# Altium PCB PCB_V3.PcbDoc (part 2 of 2)
Units mm, origin at the board's own origin, x right, y up, seen from the top; angles counter-clockwise.
Board outline 100 x 50 mm, 4 copper layers (Top Layer, Vdd, GND, Bottom Layer), stack 0.603 mm thick; 120 components, 77 nets, 428 pads, 297 vias.
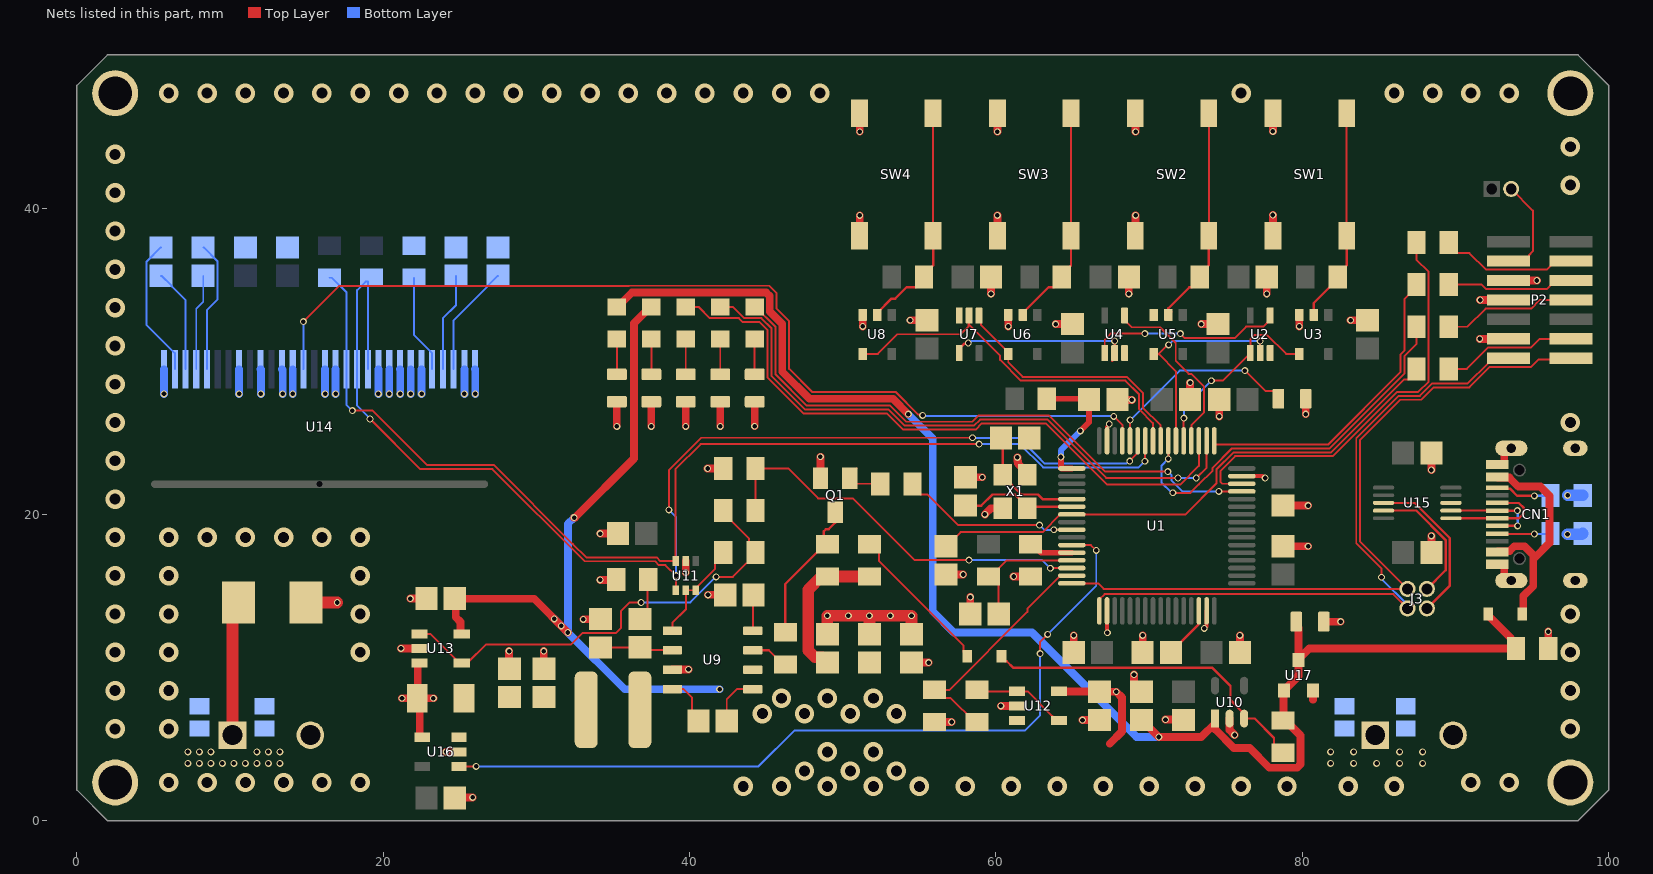
[diagram p4: the nets of this part, all layers, seen from the top]

## Via types
v1: diameter 0.45, hole 0.3, Top Layer to Bottom Layer, 202 vias
v2: diameter 1.27, hole 0.711, Top Layer to Bottom Layer, 95 vias

## Nets (pads, with @x,y where several pads share a name; then routed paths per layer and width w, separated by ;. In a path a pad name is that pad's centre, name@x,y a point inside that pad or via, vN(x,y) a via of type N, cw(c..) or ccw(c..) an arc to the next point about the centre after c; other vN are vias at no path point) (continued)
+12: C29.1 C30.1 C31.1 C41.1 C42.1 C44.2 C45.2 J2.1 LED3.2 R23.2 R37.1 U9.2 U12.3 U12.5 U13.5 U17.2 | length 65.8
  Top Layer w0.508: U13.5@25.225,12.2 25.116,12.2 25.045,12.271 25.045,12.978 24.738,13.286 24.738,14.437 C42.1@24.675,14.5 29.848,14.5 v1(32.055,12.294) ; v1(32.461,19.787) 32.512,19.787 36.373,23.647 36.373,32.473 37.45,33.55 LED3.2@37.5,33.55 ; C31.1@54.5,10.325 55.403,10.325 v1(55.602,10.325) ; U12.5@64.225,8.45 64.237,8.438 66.737,8.438 C41.1@66.75,8.425 67.653,8.425 v1(67.852,8.425) 68.225,8.052 68.225,5.825 67.425,5.025 ; 80.7,7.897 U17.2@80.7,8.5
  Top Layer w0.762: C29.1@49,10.325 48.656,10.669 48.188,10.669 47.742,11.115 47.742,15.092 48.6,15.95 R37.1@51.25,15.95
  Bottom Layer w0.508: v1(31.162,13.183) 31.166,13.183 v1(31.623,12.725) v1(32.055,12.294) ; v1(32.461,19.787) 32.055,19.38 v1(32.055,12.294) ; v1(41.961,8.585) 35.763,8.585 v1(32.055,12.294)
  other v1: 81.85,3.75 83.35,3.75 84.85,3.75 86.35,3.75 87.85,3.75 81.85,4.5 83.35,4.5 86.35,4.5 87.85,4.5
  other v2: 43.5,2.25 46,2.25 49,2.25 52,2.25 55,2.25 58,2.25 61,2.25 64,2.25 67,2.25 70,2.25 73,2.25 76,2.25 79,2.25 83,2.25 86,2.25 47.5,3.25 50.5,3.25 53.5,3.25 49,4.5 52,4.5 44.75,7 47.5,7 50.5,7 53.5,7 46,8 49,8 52,8
AGND: R7.1 U1.12 | length 2.9
  Top Layer w0.381: R7.1@62.25,18.05 62.4,18.05 62.95,17.5 U1.12@64.95,17.5
CH_RX: J3.2 U15.9 | length 8.6
  Top Layer w0.152: U15.9@85.3,20.25 87.437,20.25 89.353,18.334 89.353,16.353 J3.2@88.135,15.135
CH_TX: J3.4 U15.8 | length 10.5
  Top Layer w0.152: U15.8@85.3,20.75 87.332,20.75 89.633,18.45 89.633,15.363 J3.4@88.135,13.865
D_N: CN1.A7 CN1.B7 U15.2 | length 6.7
  Top Layer w0.152: U15.2@89.7,20.25 CN1.A7@92.725,20.25 92.728,20.247 94.031,20.247 v1(94.034,20.244) ; CN1.B7@92.725,19.25 92.727,19.252 94.055,19.252 v1(94.056,19.253)
  Bottom Layer w0.152: v1(94.034,20.244) 94.056,20.222 v1(94.056,19.253)
D_P: CN1.A6 CN1.B6 U15.1 | length 7.1
  Top Layer w0.152: U15.1@89.7,19.75 CN1.A6@92.725,19.75 94.146,19.75 94.463,20.066 94.463,20.421 94.134,20.75 CN1.B6@92.725,20.75
GND: C1.2 C2.1 C3.1 C4.2 C5.1 C6.1 C7.1 C8.1 C9.1 C10.1 C11.1 C12.1 C13.2 C14.2 C15.2 C16.2 C17.2 C18.2 C19.2 C20.2 C21.1 C24.2 C25.2 C26.1 C27.1 C28.2 C29.2 C30.2 C31.2 C33.1 C34.1 C35.2 C37.2 C38.1 C39.1 C40.2 C41.2 C42.2 C43.1 C44.1 C45.1 C46.1 C47.1 CN1.A1/B12 CN1.B1/A12 CN1.S1 CN1.S2 CN1.S3 CN1.S4 D2.2 J1.2 J2.2 P2.5 P2.7 P2.11 pad.2 Q1.2 R7.2 R14.2 R15.2 R16.2 R18.2 R20.1 R25.1 R27.1 R29.1 R30.1 R31.1 R32.1 R33.1 R34.1 SW1.1 SW1.3 SW2.1 SW2.3 SW3.1 SW3.3 SW4.1 SW4.3 U1.18 U1.31 U1.47 U1.63 U2.3 U3.3 U4.3 U5.3 U6.3 U7.3 U8.3 U9.7 U10.2 U11.2 U12.2 U13.2 U14.1 U14.8 U14.10 U14.12 U14.13 U14.16 U14.17 U14.21 U14.22 U14.23 U14.24 U14.25 U14.29 U14.30 U15.3 U16.2 X1.2 X1.4 | length 123.5
  Top Layer w0.254: U1.18@67.25,13.7 67.259,13.691 67.259,12.287 v1(67.271,12.275) ; U1.63@67.25,24.8 67.259,24.809 67.259,25.718 67.392,25.852 v1(67.392,25.905) ; v1(73.6,12.564) 73.605,12.559 73.742,12.695 73.742,12.719 73.75,12.727 U1.31@73.75,13.7 ; U1.47@76.05,22.5 77.397,22.5 77.522,22.375 v1(77.575,22.375)
  Top Layer w0.508: v1(21.158,11.252) 21.16,11.25 U13.2@22.275,11.25 ; v1(21.768,14.503) 22.822,14.503 C42.2@22.825,14.5 ; v1(24.105,4.496) 24.895,4.496 24.92,4.47 U16.2@24.95,4.5 ; C28.2@24.675,1.5 24.699,1.524 v1(25.832,1.524) ; v1(28.219,11.074) 28.219,10.396 28.179,10.356 27.794,10.356 28.225,9.925 C33.1@28.25,9.925 ; v1(30.48,11.074) 30.48,9.945 C34.1@30.5,9.925 ; v1(33.057,13.15) 34.156,13.15 C37.2@34.173,13.168 ; v1(34.161,15.723) 35.173,15.723 R18.2@35.2,15.75 ; v1(34.163,18.745) 35.32,18.745 C40.2@35.325,18.75 ; v1(35.25,25.75) R32.1@35.25,27.35 ; v1(37.5,25.75) R31.1@37.5,27.35 ; U9.7@38.875,9.865 38.891,9.881 v1(39.929,9.881) ; U11.2@39.75,16.95 U11.2@39.75,16.95 v1(39.751,16.205) ; v1(39.75,25.75) R29.1@39.75,27.35 ; v1(41.173,22.998) 42.198,22.998 R25.1@42.2,23 ; v1(41.199,14.749) C35.2@42.325,14.75 ; v1(42,25.75) R30.1@42,27.35 ; v1(44.247,25.756) 44.25,25.759 R34.1@44.25,27.35 ; v1(48.539,23.766) 48.55,23.756 Q1.2@48.55,22.35 ; SW4.1@51.095,38.201 51.105,38.211 v1(51.105,39.522) ; SW4.3@51.095,46.201 51.105,46.191 v1(51.105,44.983) ; v1(51.3,32.273) 51.3,32.472 U8.3@51.3,33.025 ; v1(54.398,32.675) 54.597,32.675 C16.2@55.5,32.675 ; R20.1@56,6.45 56.903,6.45 v1(57.102,6.45) ; C1.2@56.75,16.075 v1(57.852,16.075) ; C2.1@58,22.425 v1(59.102,22.425) ; C11.1@58.325,13.5 58.325,14.403 v1(58.325,14.602) ; v1(59.275,20) 59.675,20.4 X1.2@60.45,20.4 ; v1(59.675,34.398) 59.675,34.597 C15.2@59.675,35.5 ; SW3.1@60.096,38.211 v1(60.096,39.522) ; v1(60.096,44.983) SW3.3@60.096,46.191 ; v1(60.323,7.5) 60.522,7.5 U12.2@61.275,7.5 ; v1(60.8,32.273) 60.8,32.472 U6.3@60.8,33.025 ; v1(61.148,15.95) 61.347,15.95 R7.2@62.25,15.95 ; v1(61.4,23.725) 61.4,23.489 61.431,23.458 61.431,23.319 62.05,22.7 X1.4@62.05,22.6 ; v1(63.898,32.425) v1@64.097,32.425 ; v1@64.097,32.425 C17.2@65,32.425 ; C6.1@65.075,11 v1(65.075,12.102) ; v1(65.648,6.575) 65.847,6.575 C41.2@66.75,6.575 ; C12.1@67.925,27.5 67.95,27.475 v1(68.875,27.475) ; v1(68.675,34.398) 68.675,34.597 C14.2@68.675,35.5 ; v1(69.014,9.542) 69.014,8.896 C38.1@69.485,8.425 ; SW2.1@69.113,38.211 v1(69.113,39.522) ; v1(69.113,44.983) SW2.3@69.113,46.191 ; C4.2@69.575,11 69.575,11.903 v1(69.575,12.102) ; v1(71.069,6.604) 72.221,6.604 C39.1@72.25,6.575 ; C7.1@72.675,27.5 72.675,28.403 v1(72.675,28.602) ; v1(73.398,32.425) v1@73.597,32.425 ; v1@73.597,32.425 C18.2@74.5,32.425 ; v1(74.575,26.398) 74.575,26.597 C10.1@74.575,27.5 ; U10.2@75.25,6.675 75.25,5.925 v1(75.575,5.6) ; C5.1@75.925,11 75.925,11.903 v1(75.925,12.102) ; v1(77.675,34.398) 77.675,34.597 C13.2@77.675,35.5 ; SW1.1@78.08,38.236 v1(78.08,39.548) ; v1(78.08,45.009) SW1.3@78.08,46.217 ; C9.1@78.75,17.925 v1(80.375,17.925) ; C8.1@78.75,20.575 v1(80.375,20.575) ; v1(79.8,32.273) 79.8,32.472 U3.3@79.8,33.025 ; v1(80.224,26.549) 80.224,26.748 R33.1@80.224,27.551 ; C43.1@81.4,13 v1(82.5,13) ; v1(83.148,32.675) 83.347,32.675 C19.2@84.25,32.675 ; C25.2@88.425,17.5 88.425,18.403 v1(88.425,18.602) ; v1(88.425,22.898) 88.425,23.097 C24.2@88.425,24 ; v1(91.582,31.46) P2.11@93.465,31.46 ; v1(91.603,34) P2.7@93.465,34 ; CN1.A1/B12@92.725,16.75 93.136,16.75 93.182,16.704 93.182,15.907 93.41,15.68 CN1.S2@93.64,15.68 ; CN1.B1/A12@92.725,23.25 93.136,23.25 93.182,23.296 93.182,24.093 93.41,24.32 CN1.S1@93.64,24.32 ; P2.5@93.465,35.27 v1(95.311,35.27) ; R27.1@96.05,11.25 96.05,12.153 v1(96.05,12.352)
  Top Layer w0.762: D2.2@14.96,14.25 v1(17,14.25) ; C29.2@49,12.175 48.997,12.178 v1(48.997,13.386) v1(50.368,13.386) v1(51.74,13.386) ; C30.2@51.75,12.175 51.74,12.185 v1(51.74,13.386) ; C31.2@54.5,12.175 54.483,12.192 v1(54.483,13.386) v1(53.111,13.386) v1(51.74,13.386)
  Bottom Layer w0.508: v1(5.69,27.864) 5.69,29.471 U14.1@5.695,29.476 ; v1(10.592,27.864) 10.592,29.473 U14.8@10.595,29.476 ; U14.10@11.995,29.476 12.014,29.457 v1(12.014,27.864) ; U14.12@13.395,29.476 13.437,29.434 v1(13.437,27.864) ; U14.13@14.095,29.476 14.097,29.474 v1(14.097,27.864) ; U14.16@16.195,29.476 16.205,29.466 v1(16.205,27.864) ; v1(16.891,27.864) 16.891,29.472 U14.17@16.895,29.476 ; v1(19.685,27.864) 19.685,29.466 U14.21@19.695,29.476 ; U14.22@20.395,29.476 20.396,29.475 v1(20.396,27.864) ; U14.23@21.095,29.476 21.107,29.464 v1(21.107,27.864) ; v1(21.793,27.864) 21.793,29.474 U14.24@21.795,29.476 ; U14.25@22.495,29.476 22.504,29.467 v1(22.504,27.864) ; U14.29@25.295,29.476 25.298,29.473 v1(25.298,27.864) ; U14.30@25.995,29.476 26.01,29.461 v1(26.01,27.864) ; R16.2@98.35,21.235 R16.2@98.357,21.242
  Bottom Layer w0.762: v1(97.308,18.694) 98.244,18.694 R15.2@98.3,18.75 ; v1(97.319,21.243) 97.326,21.25 R16.2@98.3,21.25
  other v2: 6,2.5 8.5,2.5 11,2.5 13.5,2.5 16,2.5 18.5,2.5 91,2.5 93.5,2.5 2.5,6 6,6 97.5,6 2.5,8.5 6,8.5 97.5,8.5 2.5,11 6,11 18.5,11 97.5,11 2.5,13.5 6,13.5 18.5,13.5 97.5,13.5 2.5,16 6,16 18.5,16 2.5,18.5 6,18.5 8.5,18.5 11,18.5 13.5,18.5 16,18.5 18.5,18.5 2.5,21 2.5,23.5 2.5,26 97.5,26 2.5,28.5 2.5,31 2.5,33.5 2.5,36 2.5,38.5 2.5,41 97.5,41.5 2.5,43.5 97.5,44 6,47.5 8.5,47.5 11,47.5 13.5,47.5 16,47.5 18.5,47.5 21,47.5 23.5,47.5 26,47.5 28.5,47.5 31,47.5 33.5,47.5 36,47.5 38.5,47.5 41,47.5 43.5,47.5 46,47.5 48.5,47.5 76,47.5 86,47.5 88.5,47.5 91,47.5 93.5,47.5
NetC4_1: C4.1 U1.30 | length 3.5
  Top Layer w0.152: C4.1@71.425,11 71.425,11.025 73.222,12.822 73.222,13.672 U1.30@73.25,13.7
NetC22_1: C22.1 U14.2 | length 9.1
  Bottom Layer w0.127: C22.1@5.5,37.425 5.475,37.425 4.559,36.51 4.559,32.362 6.395,30.526 U14.2@6.395,29.476
NetC22_2: C22.2 U14.3 | length 6.8
  Bottom Layer w0.127: C22.2@5.5,35.575 5.525,35.575 6.187,34.914 6.187,34.889 7.095,33.98 U14.3@7.095,29.476
NetC23_1: C23.1 U14.4 | length 6.3
  Bottom Layer w0.127: U14.4@7.795,29.476 7.795,33.424 8.25,33.879 C23.1@8.25,35.575
NetC23_2: C23.2 U14.5 | length 8.6
  Bottom Layer w0.127: C23.2@8.25,37.425 8.275,37.425 9.19,36.51 9.19,34.032 8.495,33.336 U14.5@8.495,29.476
NetC26_2: C26.2 U14.28 | length 7.3
  Bottom Layer w0.127: U14.28@24.595,29.476 24.595,32.67 26.813,34.889 26.813,34.914 27.475,35.575 C26.2@27.5,35.575
NetC27_2: C27.2 U14.27 | length 6.5
  Bottom Layer w0.127: U14.27@23.895,29.476 23.895,32.803 24.75,33.658 C27.2@24.75,35.575
NetC32_1: C32.1 U9.1 | length 3.2
  Top Layer w0.127: C32.1@42.425,6.75 42.425,7.932 43.088,8.595 U9.1@44.125,8.595
NetC32_2: C32.2 L1.1 U9.8 | length 3
  Top Layer w0.127: U9.8@38.875,8.595 38.877,8.593 39.616,8.593 40.154,8.055 40.154,7.171 C32.2@40.575,6.75
NetC33_2: C33.2 C34.2 L1.2 R17.2 U16.3
NetC35_1: C35.1 U9.4 | length 1.9
  Top Layer w0.127: U9.4@44.125,12.405 44.125,14.2 C35.1@44.175,14.25
NetC36_1: C36.1 C37.1 U9.6 | length 4
  Top Layer w0.127: C37.1@34.5,11.325 C36.1@36.75,11.325 ; C36.1@37.25,11.325 37.44,11.135 U9.6@38.875,11.135
NetC36_2: C36.2 R18.1 | length 2.7
  Top Layer w0.127: R18.1@37.175,15.8 37.25,15.725 C36.2@37.25,13.175
NetC38_2: C38.2 C43.2 D1.1 LED4.2 R27.2 R28.1 U10.1 U17.1 U17.3 | length 97.3
  Top Layer w0.508: LED4.2@35.25,33.55 35.3,33.55 36.231,34.481 43.492,34.481 45.008,34.481 45.231,34.258 45.231,33.248 46.053,32.426 46.053,29.319 47.824,27.547 53.276,27.547 v1(54.28,26.543) ; C38.2@69.5,6.575 69.525,6.575 v1(70.631,5.469) 73.407,5.469 U10.1@74.311,6.373 ; U10.1@74.3,6.675 74.311,6.664 U10.1@74.311,6.373 ; C43.2@79.61,13 79.61,12.73 79.75,12.59 U17.3@79.75,10.55 ; D1.1@92.135,13.5 92.135,13.4 93.604,11.931 93.604,11.27 93.624,11.25 80.45,11.25 U17.3@79.75,10.55 ; U10.1@74.311,6.373 74.311,5.964 75.525,4.75 76.561,4.75 77.842,3.469 79.658,3.469 79.881,3.692 79.881,5.569 78.9,6.55 R28.1@78.75,6.55 78.775,6.575 78.775,8.525 78.946,8.696 78.996,8.696 79.75,9.45 U17.3@79.75,10.5 U17.3@79.75,10.55
  Bottom Layer w0.508: v1(54.28,26.543) 55.867,24.956 55.867,13.678 57.252,12.294 62.357,12.294 69.182,5.469 v1(70.631,5.469)
NetCN1_A4/B9: CN1.A4/B9 CN1.B4/A9 D1.2 | length 15.4
  Top Layer w0.508: CN1.A4/B9@92.725,17.55 92.771,17.596 93.516,17.596 93.836,17.916 94.504,17.916 95.071,17.349 95.071,17.071 ; CN1.B4/A9@92.725,22.45 92.771,22.404 93.516,22.404 94.105,21.815 95.545,21.815 96.139,21.221 96.139,18.139 95.21,17.21 95.071,17.071 ; D1.2@94.365,13.5 94.426,13.561 94.426,14.67 95.071,15.315 95.071,17.071
NetCN1_A5: CN1.A5 R15.1 | length 3.5
  Top Layer w0.127: CN1.A5@92.725,18.75 92.74,18.735 95.133,18.735 v1(95.148,18.72)
  Bottom Layer w0.127: v1(95.148,18.72) 96.17,18.72 R15.1@96.2,18.75
NetCN1_B5: CN1.B5 R16.1 | length 3.7
  Top Layer w0.152: CN1.B5@92.725,21.75 92.789,21.686 93.554,21.686 94.031,21.209 v1(95.148,21.209)
  Bottom Layer w0.127: R16.1@96.25,21.235 R16.1@96.257,21.242
  Bottom Layer w0.152: v1(95.148,21.209) 96.159,21.209 R16.1@96.2,21.25
NetD3_1: D3.1 R28.2 U10.3 | length 22
  Top Layer w0.152: D3.1@60.365,10.75 60.365,10.65 60.604,10.411 60.704,10.411 61.116,9.999 74.101,9.999 74.494,9.606 75.311,8.789 75.311,7.877 76.2,6.988 U10.3@76.2,6.675 76.887,6.675 78.151,5.41 78.151,4.974 78.675,4.45 R28.2@78.75,4.45
NetD3_2: D3.2 R37.2 | length 10.5
  Top Layer w0.127: R37.2@51.75,17.55 R37.2@51.75,18.05 51.839,18.05 52.375,17.513 52.375,16.944 57.884,11.436 57.884,11.001 D3.2@58.135,10.75
NetLED1_1: LED1.1 R29.2 | length 2.3
  Top Layer w0.127: R29.2@39.75,29.14 LED1.1@39.75,31.45
NetLED2_1: LED2.1 R30.2 | length 2.3
  Top Layer w0.127: R30.2@42,29.14 LED2.1@42,31.45
NetLED3_1: LED3.1 R31.2 | length 2.3
  Top Layer w0.127: R31.2@37.5,29.14 LED3.1@37.5,31.45
NetLED4_1: LED4.1 R32.2 | length 2.3
  Top Layer w0.127: R32.2@35.25,29.14 LED4.1@35.25,31.45
NetLED5_1: LED5.1 R34.2 | length 2.3
  Top Layer w0.127: R34.2@44.25,29.14 LED5.1@44.25,31.45
NetP1_2: P1.2 P2.3 | length 6.6
  Top Layer w0.127: P2.3@93.465,36.54 94.49,36.54 94.797,36.847 94.797,36.927 95.051,37.181 95.051,39.834 P1.2@93.635,41.25
NetP2_4: P2.4 R1.1 | length 9
  Top Layer w0.127: R1.1@89.55,37.75 89.55,37.6 90.087,37.063 90.907,37.063 91.991,35.979 95.949,35.979 96.51,36.54 P2.4@97.535,36.54
NetP2_6: P2.6 R2.1 | length 8.3
  Top Layer w0.127: R2.1@89.55,35 91.701,35 91.991,34.709 95.949,34.709 96.51,35.27 P2.6@97.535,35.27
NetP2_8: P2.8 R3.1 | length 8.7
  Top Layer w0.127: R3.1@89.55,32.25 90.772,32.25 91.961,33.439 94.939,33.439 95.499,34 P2.8@97.535,34
NetP2_12: P2.12 R4.1 | length 8.8
  Top Layer w0.127: R4.1@89.55,29.5 90.741,29.5 92.14,30.899 94.939,30.899 95.499,31.46 P2.12@97.535,31.46
NetQ1_1: Q1.1 R26.2 | length 3
  Top Layer w0.127: Q1.1@50.887,22.987 50.45,22.55 Q1.1@50.45,22.35 50.8,22 R26.2@52.45,22
NetQ1_3: Q1.3 R23.1 R35.1 | length 8.9
  Top Layer w0.152: R35.1@46.25,12.3 46.25,15.45 48.6,17.8 48.6,18.05 48.75,18.05 48.75,18.879 48.898,19.026 49.076,19.026 49.5,19.45 Q1.3@49.5,19.65
NetR8_1: R8.1 SW1.2 SW1.4 U3.2 | length 14.1
  Top Layer w0.127: SW1.2@82.895,38.201 SW1.4@82.895,46.201
  Top Layer w0.152: U3.2@80.75,33.025 80.75,33.8 82.3,35.35 R8.1@82.3,35.5 82.3,35.65 82.895,36.245 SW1.2@82.895,38.201
NetR9_1: R9.1 SW2.2 SW2.4 U5.2 | length 14.6
  Top Layer w0.127: SW2.2@73.895,38.201 SW2.4@73.895,46.201
  Top Layer w0.152: U5.2@71.449,33.224 U5.2@71.25,33.025 71.25,33.45 72.626,34.826 72.776,34.826 73.3,35.35 R9.1@73.3,35.5 73.3,35.65 73.895,36.245 SW2.2@73.895,38.201
NetR10_1: R10.1 SW3.2 SW3.4 U6.2 | length 14.7
  Top Layer w0.127: SW3.2@64.895,38.201 SW3.4@64.895,46.201
  Top Layer w0.152: U6.2@61.75,33.025 61.75,33.15 63.426,34.826 63.776,34.826 64.3,35.35 64.3,35.65 64.895,36.245 SW3.2@64.895,38.201
NetR11_1: R11.1 SW4.2 SW4.4 U8.2 | length 15.2
  Top Layer w0.127: SW4.2@55.895,38.201 SW4.4@55.895,46.201
  Top Layer w0.152: U8.2@52.25,33.025 52.25,33.15 53.187,34.087 53.425,34.087 54.164,34.826 54.776,34.826 55.3,35.35 R11.1@55.3,35.5 55.3,35.65 55.895,36.245 SW4.2@55.895,38.201
NetR14_1: R14.1 U14.26 | length 6.5
  Bottom Layer w0.127: R14.1@22,35.45 22,31.721 23.195,30.526 U14.26@23.195,29.476
NetR19_1: R19.1 U12.1 U12.4 | length 6.3
  Top Layer w0.127: R19.1@58.75,8.55 58.85,8.45 61.275,8.45 62.065,8.45 63.688,6.827 63.688,6.812 63.95,6.55 U12.4@64.225,6.55
NetR21_1: R21.1 R22.1 U13.1 U13.4 | length 30.2
  Top Layer w0.127: U13.1@22.275,12.2 23.081,12.2 24.688,10.592 24.688,10.562 24.95,10.3 25.225,10.3 25.5,10.3 26.719,11.519 32.269,11.519 33,12.25 35.186,12.25 35.535,12.598 35.535,13.704 36.083,14.252 v1(36.834,14.252) ; v1(41.735,15.923) 42.823,15.923 43.713,16.813 43.763,16.813 44.3,17.35 R21.1@44.3,17.5 43.89,17.91 43.89,18.41 42.2,20.1 R22.1@42.2,20.25
  Bottom Layer w0.127: v1(36.834,14.252) 36.846,14.263 40.044,14.263 41.704,15.923 v1(41.735,15.923)
NetR33_2: R33.2 U1.60 | length 13.2
  Top Layer w0.127: U1.60@68.75,24.8 68.754,24.804 68.754,26.158 v1(68.758,26.162) ; v1(76.251,29.388) 76.282,29.388 77.627,28.042 78.12,28.042 78.434,27.728 R33.2@78.434,27.551
  Bottom Layer w0.127: v1(68.758,26.162) 71.984,29.388 v1(76.251,29.388)
NetU2_4: U2.4 U4.1 | length 12.7
  Top Layer w0.127: U4.1@67.1,30.525 67.1,31.413 67.488,31.801 v1(69.723,31.801) ; v1(72.034,31.801) 72.326,31.51 75.575,31.51 76.325,32.26 77.435,32.26 77.9,32.725 U2.4@77.9,32.975
  Bottom Layer w0.127: v1(69.723,31.801) v1(72.034,31.801)
NetU4_2: U4.2 U7.4 | length 12
  Top Layer w0.152: U7.4@57.6,30.525 57.6,30.825 57.909,31.134 58.134,31.134 v1(58.191,31.191) ; U4.2@67.601,30.018 67.601,30.376 U4.2@67.75,30.525 67.746,30.529 67.746,31.314 v1(67.742,31.318)
  Bottom Layer w0.152: v1(58.191,31.191) 58.272,31.191 58.399,31.318 v1(67.742,31.318)
NRST: C1.1 R4.2 U1.7 | length 36.1
  Top Layer w0.127: C1.1@56.75,17.925 56.775,17.925 57.691,18.841 63.041,18.841 64.2,20 72.375,20 74.397,22.022 74.397,22.937 75.513,24.054 81.886,24.054 86.646,28.813 86.913,28.813 87.45,29.35 R4.2@87.45,29.5
PA0: R22.2 R25.2 U1.14 | length 26.4
  Top Layer w0.127: R22.2@44.3,19.75 R22.2@44.3,20 ; R22.2@44.3,20.25 R25.2@44.3,23 46.431,23 48.39,21.041 50.664,21.041 54.695,17.009 58.234,17.009 v1(58.242,17.018) ; v1(63.551,16.485) 63.559,16.492 64.942,16.492 U1.14@64.95,16.5
  Bottom Layer w0.127: v1(58.242,17.018) 63.017,17.018 v1(63.551,16.485)
PA1: R19.2 R20.2 U1.15 | length 15.8
  Top Layer w0.127: R19.2@58.75,6.45 58.6,6.45 57.036,8.013 56.537,8.013 R20.2@56,8.55 56.969,8.55 62.052,13.633 62.052,13.852 64.2,16 U1.15@64.95,16
PA2: J3.1 P2.14 U1.16 | length 48.7
  Top Layer w0.127: U1.16@64.95,15.5 66.669,15.5 67.034,15.135 J3.1@86.615,15.135 ; J3.1@86.865,15.135 86.617,15.135 86.617,15.383 83.775,18.225 83.775,24.865 86.395,27.485 87.773,27.485 88.583,28.296 90.905,28.296 92.239,29.629 94.939,29.629 95.408,30.099 97.216,30.099 P2.14@97.307,30.19
PA3: J3.3 P2.13 U1.17 | length 46
  Top Layer w0.127: U1.17@66.75,13.7 66.75,14.45 67.091,14.791 85.939,14.791 J3.3@86.865,13.865 ; v1(85.166,15.9) 85.166,16.475 83.521,18.12 83.521,24.97 86.29,27.739 87.668,27.739 88.478,28.55 90.8,28.55 92.133,29.883 92.44,30.19 P2.13@93.465,30.19
  Bottom Layer w0.127: v1(85.166,15.9) 85.166,15.813 86.865,14.114 J3.3@86.865,13.865
PA12: LED5.2 U1.45 | length 39.1
  Top Layer w0.127: LED5.2@44.25,33.55 44.3,33.55 45.608,32.242 45.608,29.135 47.64,27.103 48.208,27.103 48.209,27.102 53.092,27.102 54.146,26.048 58.454,26.048 58.855,26.449 63.475,26.449 67.129,22.795 v1(71.222,22.795) ; v1(74.554,21.5) U1.45@76.05,21.5
  Bottom Layer w0.127: v1(71.222,22.795) 71.465,22.551 71.465,22.207 72.172,21.5 v1(74.554,21.5)
PA13: R1.2 U1.46 | length 27.6
  Top Layer w0.127: U1.46@76.05,22 74.774,22 74.651,22.123 74.651,22.832 75.618,23.8 81.991,23.8 86.185,27.993 87.563,27.993 88.24,28.671 88.24,35.829 87.45,36.619 R1.2@87.45,37.75
PA14: R2.2 U1.49 | length 20.4
  Top Layer w0.127: U1.49@74.25,24.8 74.25,24.642 74.33,24.562 81.676,24.562 86.405,29.292 86.405,30.434 86.659,30.688 86.659,34.06 87.45,34.85 R2.2@87.45,35
PA15: LED2.2 U1.50 | length 40.6
  Top Layer w0.127: LED2.2@42,33.55 42.831,33.55 43.571,32.81 44.681,32.81 45.354,32.137 45.354,29.03 47.536,26.848 52.987,26.848 54.041,25.794 58.56,25.794 58.961,26.195 63.37,26.195 65.839,23.725 67.185,22.379 v1(71.88,22.379) ; v1(73.076,22.377) 73.75,23.052 U1.50@73.75,24.8
  Bottom Layer w0.127: v1@71.881,22.378 v1(73.076,22.377)
PB3: R3.2 U1.55 | length 25.8
  Top Layer w0.127: v1(71.247,23.622) 71.249,23.624 71.249,24.799 U1.55@71.25,24.8 ; v1(71.552,21.412) 72.698,21.412 73.248,21.962 74.143,22.857 74.143,23.043 75.408,24.308 81.781,24.308 86.659,29.187 86.659,30.329 87.45,31.119 R3.2@87.45,32.25
  Bottom Layer w0.127: v1(71.247,23.622) 70.806,23.181 70.806,22.082 71.476,21.412 v1(71.552,21.412)
PB4: U1.56 U6.4 U7.1 | length 17.1
  Top Layer w0.127: U7.1@58.9,32.975 59.014,32.861 59.014,32.386 60.589,30.812 60.8,30.6 60.8,29.919 61.737,28.981 68.547,28.981 69.596,27.933 69.596,26.975 70.75,25.821 U1.56@70.75,24.8
PB5: U1.57 U7.2 U8.4 | length 24.9
  Top Layer w0.127: U8.4@51.3,30.475 52.285,30.475 53.569,31.759 57.684,31.759 58.217,32.292 58.217,32.435 ; U7.2@58.25,32.975 58.25,32.675 58.25,32.395 60.274,30.37 60.274,30.085 61.632,28.727 68.442,28.727 69.342,27.827 69.342,26.87 70.25,25.962 U1.57@70.25,24.8
PB6: R13.1 U1.58 U11.3 U14.18 | length 74.1
  Top Layer w0.127: v1(17.983,26.772) 19.308,26.772 22.864,23.216 27.232,23.216 32.385,18.063 33.252,17.196 37.85,17.196 38.095,16.95 U11.3@39.1,16.95 39.065,16.985 39.065,22.936 40.716,24.587 v1(58.903,24.587) ; v1(69.723,23.47) 69.737,23.483 69.737,24.786 U1.58@69.75,24.8
  Bottom Layer w0.127: R13.1@16.5,35.45 16.65,35.45 17.602,34.498 17.602,29.483 U14.18@17.595,29.476 17.595,27.16 v1(17.983,26.772) ; v1(58.903,24.587) 61.55,24.587 63.074,23.063 69.317,23.063 v1(69.723,23.47)
PB7: R12.1 U1.59 U11.4 U14.19 U14.20 | length 80.9
  Top Layer w0.127: v1(19.139,26.229) 19.161,26.229 22.428,22.962 27.127,22.962 33.147,16.942 37.744,16.942 37.99,16.696 38.422,16.696 v1(39.116,16.002) 39.116,15.066 U11.4@39.1,15.05 ; v1(38.65,20.295) 38.65,22.88 40.774,25.004 v1(58.471,25.003) v1(58.471,25.003) ; v1(68.732,23.479) 68.732,23.506 69.25,24.023 U1.59@69.25,24.8
  Bottom Layer w0.127: U14.20@18.995,29.476 18.995,35.195 18.845,35.195 18.295,34.645 U14.19@18.295,29.476 18.295,27.095 19.139,26.251 v1(19.139,26.229) ; v1(38.65,20.295) 39.116,19.828 v1(39.116,16.002) ; v1(58.471,25.003) 61.494,25.003 62.679,23.817 63.179,23.317 68.497,23.317 68.658,23.479 v1(68.732,23.479)
PB8: U1.61 U14.14 | length 64.8
  Top Layer w0.127: v1(14.783,32.588) 17.12,34.925 36.046,34.925 43.308,34.926 45.192,34.926 45.676,34.442 45.676,33.432 46.497,32.61 46.497,29.503 48.008,27.992 53.46,27.992 54.936,26.516 55.164,26.516 v1(55.217,26.463) ; v1(67.691,26.398) 68.25,25.839 U1.61@68.25,24.8
  Bottom Layer w0.127: v1(14.783,32.588) 14.783,29.488 U14.14@14.795,29.476 ; v1(55.217,26.463) 55.249,26.431 67.658,26.431 v1(67.691,26.398)
PC1: R26.1 U1.9 | length 11.7
  Top Layer w0.127: R26.1@54.55,22 54.55,21.85 55.087,21.313 55.517,21.313 57.527,19.304 v1(62.84,19.304) ; v1(63.783,18.995) 63.785,18.998 64.948,18.998 U1.9@64.95,19
  Bottom Layer w0.127: v1(62.84,19.304) 63.148,18.995 v1(63.783,18.995)
PC3: U1.11 U16.1 | length 53.3
  Top Layer w0.127: U16.1@24.95,3.55 26.054,3.55 v1(26.06,3.556) ; v1(62.881,10.913) 62.881,11.675 v1(63.373,12.167) ; U1.11@64.95,18 66.201,18 v1(66.548,17.653)
  Bottom Layer w0.127: v1(26.06,3.556) 44.498,3.556 46.835,5.893 61.874,5.893 62.881,6.899 v1(62.881,10.913) ; v1(63.373,12.167) 66.548,15.342 v1(66.548,17.653)
PC10: LED1.2 U1.51 | length 42.6
  Top Layer w0.127: LED1.2@39.75,33.55 40.581,33.55 41.321,32.81 43.212,32.81 43.466,32.556 44.576,32.556 45.1,32.032 45.1,28.924 47.431,26.594 52.882,26.594 53.936,25.54 58.665,25.54 59.066,25.941 63.264,25.941 67.259,21.946 72.034,21.946 73.25,23.161 U1.51@73.25,24.8
PC11: U1.52 U4.4 | length 11.8
  Top Layer w0.127: U4.4@68.4,32.975 68.4,32.675 68.859,32.216 70.708,32.216 71.734,31.19 71.734,30.025 72.583,29.177 72.742,29.177 73.59,28.329 73.59,26.671 72.75,25.831 U1.52@72.75,24.8
PC12: U1.53 U2.1 U3.4 | length 12.7
  Top Layer w0.127: U1.53@72.25,24.8 72.257,24.806 72.257,26.283 v1(72.263,26.289) ; v1(74.066,28.727) 74.802,28.727 U2.1@76.6,30.525 76.606,30.531 76.606,31.445 76.886,31.725 77.691,31.725 78.94,30.475 U3.4@79.8,30.475
  Bottom Layer w0.127: v1(72.263,26.289) 72.263,26.924 v1(74.066,28.727)
PD2: U1.54 U2.2 U5.4 | length 14.7
  Top Layer w0.127: U5.4@70.3,30.475 70.62,30.475 70.652,30.443 71.75,29.345 U1.54@71.75,24.8 U1.54@71.75,24.3 ; 70.62,30.48 71.204,31.064 v1(71.272,31.064) ; v1(77.241,31.309) 77.246,31.305 77.246,30.529 U2.2@77.25,30.525
  Bottom Layer w0.127: v1(71.272,31.064) 71.517,31.309 v1(77.241,31.309)
PWR_FB: R21.2 U9.5 U11.5 U11.6 | length 6.9
  Top Layer w0.127: U9.5@38.875,12.405 38.875,12.916 39.751,13.792 U11.5@39.75,15.05 U11.5@39.75,15.05 U11.6@40.4,15.05 40.4,15.175 41.663,16.438 41.663,16.963 R21.2@42.2,17.5
TPS_REG_EN: R35.2 U9.3 | length 2.5
  Top Layer w0.152: U9.3@44.125,11.135 45.165,11.135 46.1,10.2 R35.2@46.25,10.2
Vbat: C12.2 R5.2 U1.1 | length 8.7
  Top Layer w0.381: R5.2@63.323,27.551 66.024,27.551 C12.2@66.075,27.5 66.075,26.019 v1(65.507,25.451) ; v1(64.237,23.749) 64.25,23.736 64.25,23.041 64.29,23 U1.1@64.95,23
  Bottom Layer w0.381: v1(64.237,23.749) 64.237,24.181 v1(65.507,25.451)
VCC: C46.2 C47.2 D2.1 J1.1 R17.1 U13.3 U16.4 | length 15.9
  Top Layer w0.508: v1(21.225,8) R17.1@22.225,8 ; U13.3@22.275,10.3 22.25,10.275 22.25,8.025 R17.1@22.225,8 ; U16.4@22.55,5.45 22.434,5.45 22.388,5.496 22.388,7.837 R17.1@22.225,8 ; v1(23.275,8) R17.1@22.225,8
  Top Layer w0.762: J1.1@10.16,5.588 10.16,13.87 D2.1@10.54,14.25
  other v1: 7.25,3.75 8,3.75 8.75,3.75 9.5,3.75 10.25,3.75 11,3.75 11.75,3.75 12.5,3.75 13.25,3.75 7.25,4.5 8,4.5 8.75,4.5 11.75,4.5 12.5,4.5 13.25,4.5
Vref: C11.2 R6.2 U1.13 | length 8.6
  Top Layer w0.127: R6.2@59.5,15.95 R6.2@59.638,15.95 ; C11.2@60.175,13.5 60.175,15.413 R6.2@59.638,15.95 ; U1.13@64.95,17 60.7,17 59.65,15.95 R6.2@59.638,15.95
X1_1: C3.2 U1.5 X1.1 | length 7.7
  Top Layer w0.152: C3.2@60.325,25 60.45,24.875 X1.1@60.45,22.6 60.45,22.5 61.647,21.303 62.738,21.303 63.041,21 U1.5@64.95,21
X1_2: C2.2 U1.6 X1.3 | length 7.7
  Top Layer w0.152: C2.2@58,20.575 59.038,20.575 59.766,21.303 61.247,21.303 62.05,20.5 X1.3@62.05,20.4 62.15,20.5 U1.6@64.95,20.5
pads on no net: CN1.A8 CN1.B8 CN1.H1 CN1.H2 P2.1 P2.2 P2.9 P2.10 U1.2 U1.3 U1.4 U1.8 U1.10 U1.20 U1.21 U1.22 U1.23 U1.24 U1.25 U1.26 U1.27 U1.28 U1.29 U1.33 U1.34 U1.35 U1.36 U1.37 U1.38 U1.39 U1.40 U1.41 U1.42 U1.43 U1.44 U1.62 U3.1 U5.1 U6.1 U8.1 U10.4 U14.31 U15.4 U15.5 U15.6

## Polygon pours and split planes (outlines as drawn)
GND on Top Layer "GND_L01_P004" (solid, pour order 4): 2,50 98,50 100,48 100,2 98,0 2,0 0,2 0,48
+12 on Top Layer "Vcc" (solid, pour order 0): 58.75,7 63.235,7.005 64.5,5.75 65.25,5 79.75,5 80.75,5 ccw(c80.75,5.5) 81.25,5.5 81.25,6.5 ccw(c80.75,6.5) 80.75,7 80.45,7 cw(c80.45,7.7) 79.75,7.7 79.75,9.075 79.763,9.075 cw(c80.138,9.075) 80.138,9.45 86,9.5 cw(c86,7.25) 88.25,7.25 88.25,2 cw(c87.25,2) 87.25,1 43.5,1 cw(c43.5,3) 41.5,3 41.5,10 cw(c43,10) 43,11.5 56,11.5 cw(c56,9.5) 58,9.5 58,7.75
VCC on Top Layer "VCC_L01_P001" (solid, pour order 1): 11.098,3.51 11.107,3.5 13.25,3.5 ccw(c13.25,3.75) 13.5,3.75 13.5,6 cw(c14,6) 14,6.5 23,6.5 ccw(c23,7) 23.5,7 23.5,9 ccw(c23,9) 23,9.5 8.25,9.5 ccw(c8.25,8.25) 7,8.25 7,3.75 ccw(c7.25,3.75) 7.25,3.5 11,3.5 ccw(c11,4)
NetC33_2 on Top Layer "NETC33_2_L01_P002" (solid, pour order 2): 26.5,9.5 cw(c26.5,9) 27,9 31.5,9 ccw(c31.5,9.5) 32,9.5 32,10 cw(c32.5,10) 32.5,10.5 34,10.5 cw(c34,10) 34.5,10 34.5,5 cw(c33.5,5) 33.5,4 29.5,4 cw(c29.5,5) 28.5,5 24.5,5 cw(c24.5,5.5) 24,5.5 24,9 cw(c24.5,9) 24.5,9.5
NetC32_2 on Top Layer "NETC32_2_L01_P003" (solid, pour order 3): 38,9.25 ccw(c38.25,9.25) 38.25,9 40.5,9 cw(c40.5,8.5) 41,8.5 41,4.5 cw(c40.5,4.5) 40.5,4 36,4 cw(c35.999,4.499) 35.5,4.5 35.5,10 cw(c36,10) 36,10.5 37.5,10.5 cw(c37.501,10.001) 38,10
GND on Bottom Layer "GND_L04_P010" (solid, pour order 10): 0,48 2,50 98,50 100,48 100,2 98,0 2,0 0,2
+12 on Bottom Layer "+12_L04_P005" (solid, pour order 5): 81.6,6.5 cw(c81.85,6.5) 81.85,6.75 87.85,6.75 cw(c87.85,6.5) 88.1,6.5 88.1,3.75 cw(c87.851,3.749) 87.85,3.5 81.85,3.5 cw(c81.85,3.75) 81.6,3.75
VCC on Bottom Layer "VCC_L04_P009" (solid, pour order 9): 7,6.5 cw(c7.25,6.5) 7.25,6.75 13.25,6.75 cw(c13.25,6.5) 13.5,6.5 13.5,3.75 cw(c13.251,3.749) 13.25,3.5 7.25,3.5 cw(c7.25,3.75) 7,3.75
GND on GND (split plane): 99.49,47.789 99.49,2.211 97.789,0.51 2.211,0.51 0.51,2.211 0.51,47.789 2.211,49.49 97.789,49.49
+3v3 on Vdd (split plane): 99.49,47.789 99.49,2.211 97.789,0.51 2.211,0.51 0.51,2.211 0.51,47.789 2.211,49.49 97.789,49.49
+12 on Vdd (split plane): 57.871,9.696 57.871,6 57.88,5.95 57.908,5.908 58.908,4.908 58.95,4.88 59,4.871 82.25,4.871 82.3,4.88 82.342,4.908 82.842,5.408 82.87,5.45 82.879,5.5 82.879,7.196 83.554,7.871 86.946,7.871 87.621,7.196 87.621,5.625 87.621,4.375 87.621,2.054 86.696,1.129 43.304,1.129 41.629,2.804 41.629,3 41.629,9.696 43.054,11.121 56.446,11.121

## Other copper
Vdd (plane layer: these items are gaps in the copper):
  lines w0.254: 41.5,2.75 41.5,3 41.5,9.75 43,11.25 56.5,11.25 58,9.75 58,6 59,5 82.25,5 82.75,5.5 82.75,7.25 83.5,8 87,8 87.75,7.25 87.75,5.625 87.75,4.375 87.75,2 86.75,1 43.25,1 41.5,2.75

## Silkscreen, mask and mechanical layers (free items; w line width, h text height)
Top Overlay:
  text "OE" at 52.23,47.504 h1.52
  text "UP" at 61.23,47.504 h1.52
  text "DW" at 70.23,47.504 h1.52
  text "V/I" at 78.723,47.504 h1.52
  text "ADSEHGAL" at 29.266,40.762 h2.54
  text "Power Supply Rev 1.1" at 27.99,38.385 h1.14
  text "github.com/adsehgal" at 28.562,35.885 h1.14
  text "USB  Vin  CC  OE   V!I" at 34.25,30.013 h1.2
  text "Vout" at 7.711,10.254 h1.52
  text "GND" at 13.469,10.254 h1.52
  text "Vin" at 82.846,10.254 h1.52
  text "GND" at 87.969,10.254 h1.52